# Altium PCB AltiumSTM32_PCB.PcbDoc
Units mm, origin at the board's own origin, x right, y up, seen from the top; angles counter-clockwise.
Board outline 34 x 34 mm, 4 copper layers (L1 (Signal), L2 (GND), L2 (GND) (Mid2), L4 (Signal)), stack 1.586 mm thick; 35 components, 27 nets, 172 pads, 106 vias.
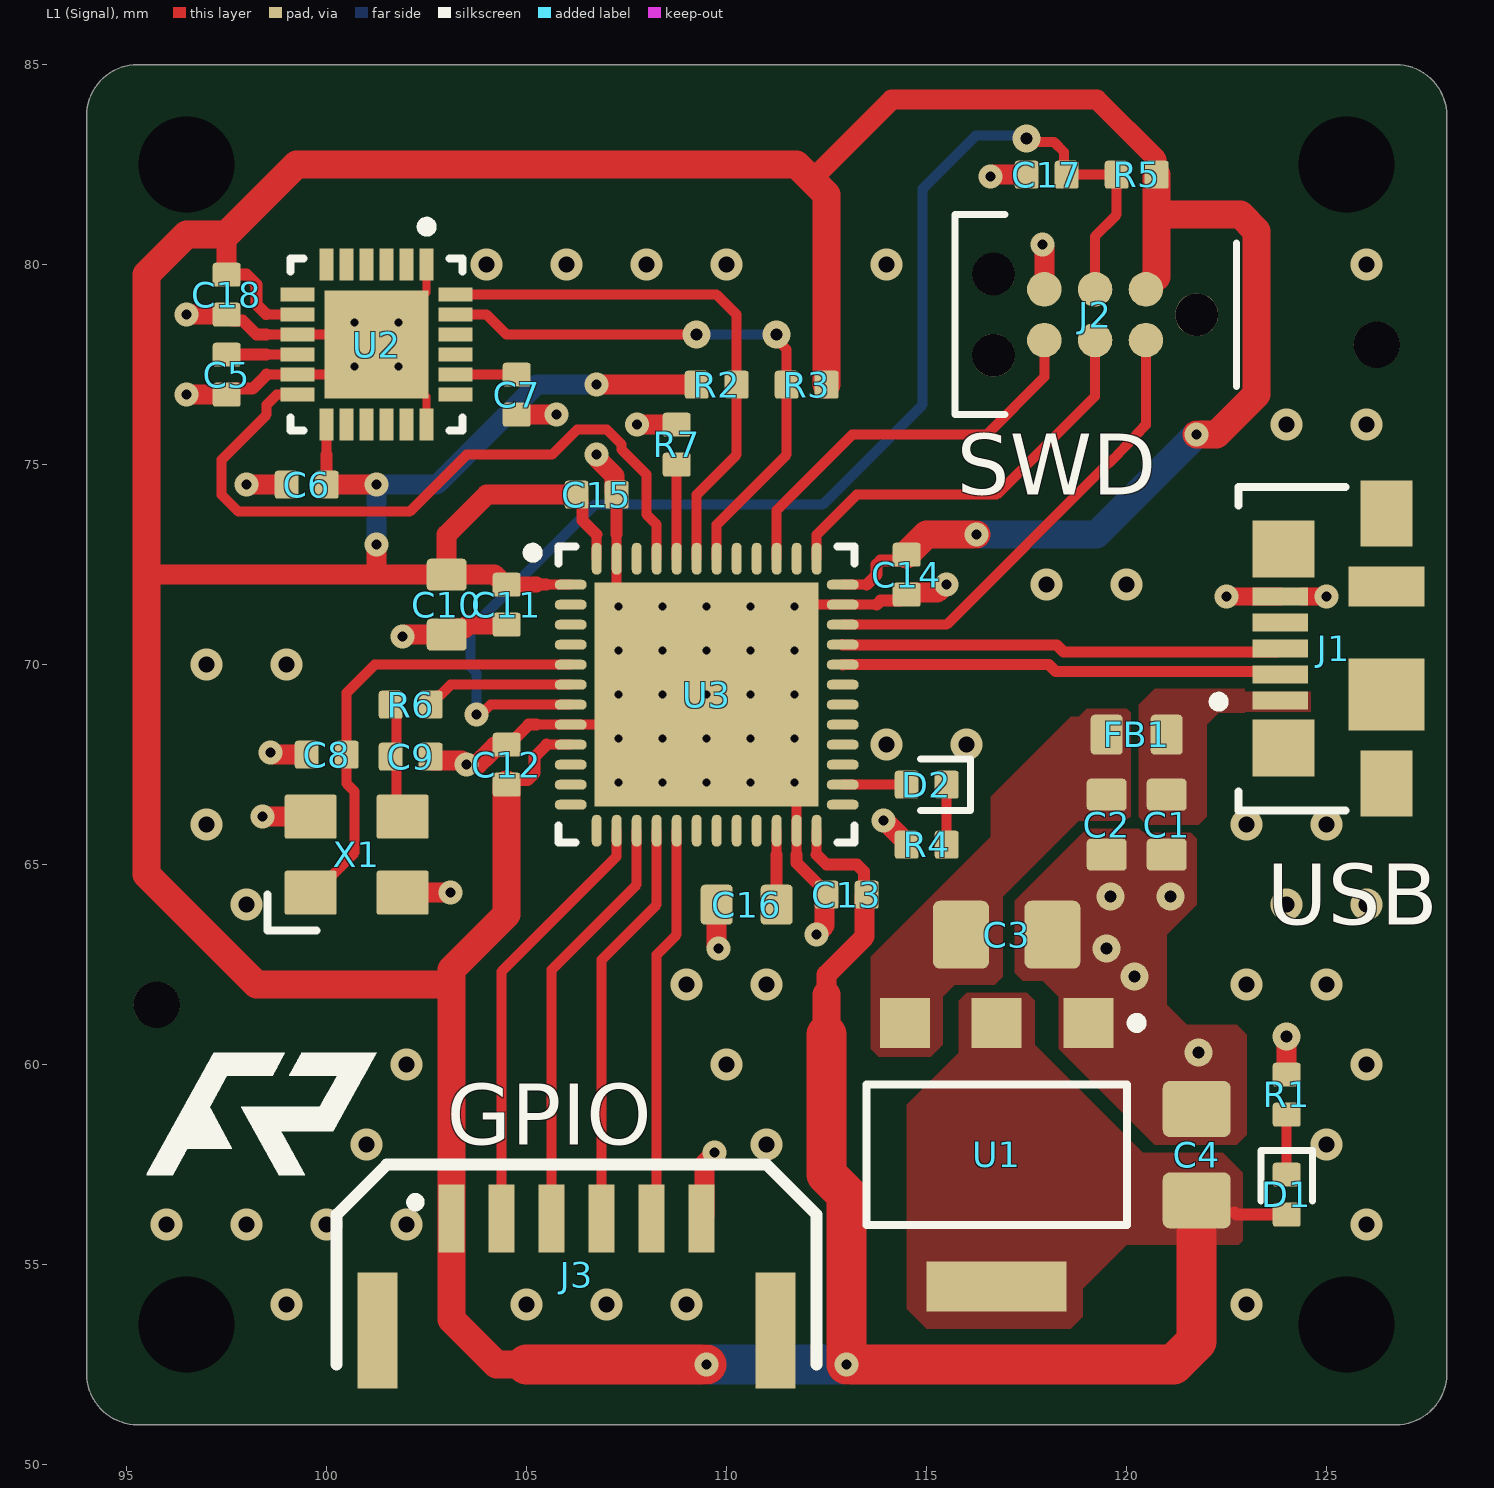
[diagram p0: L1 (Signal) view]
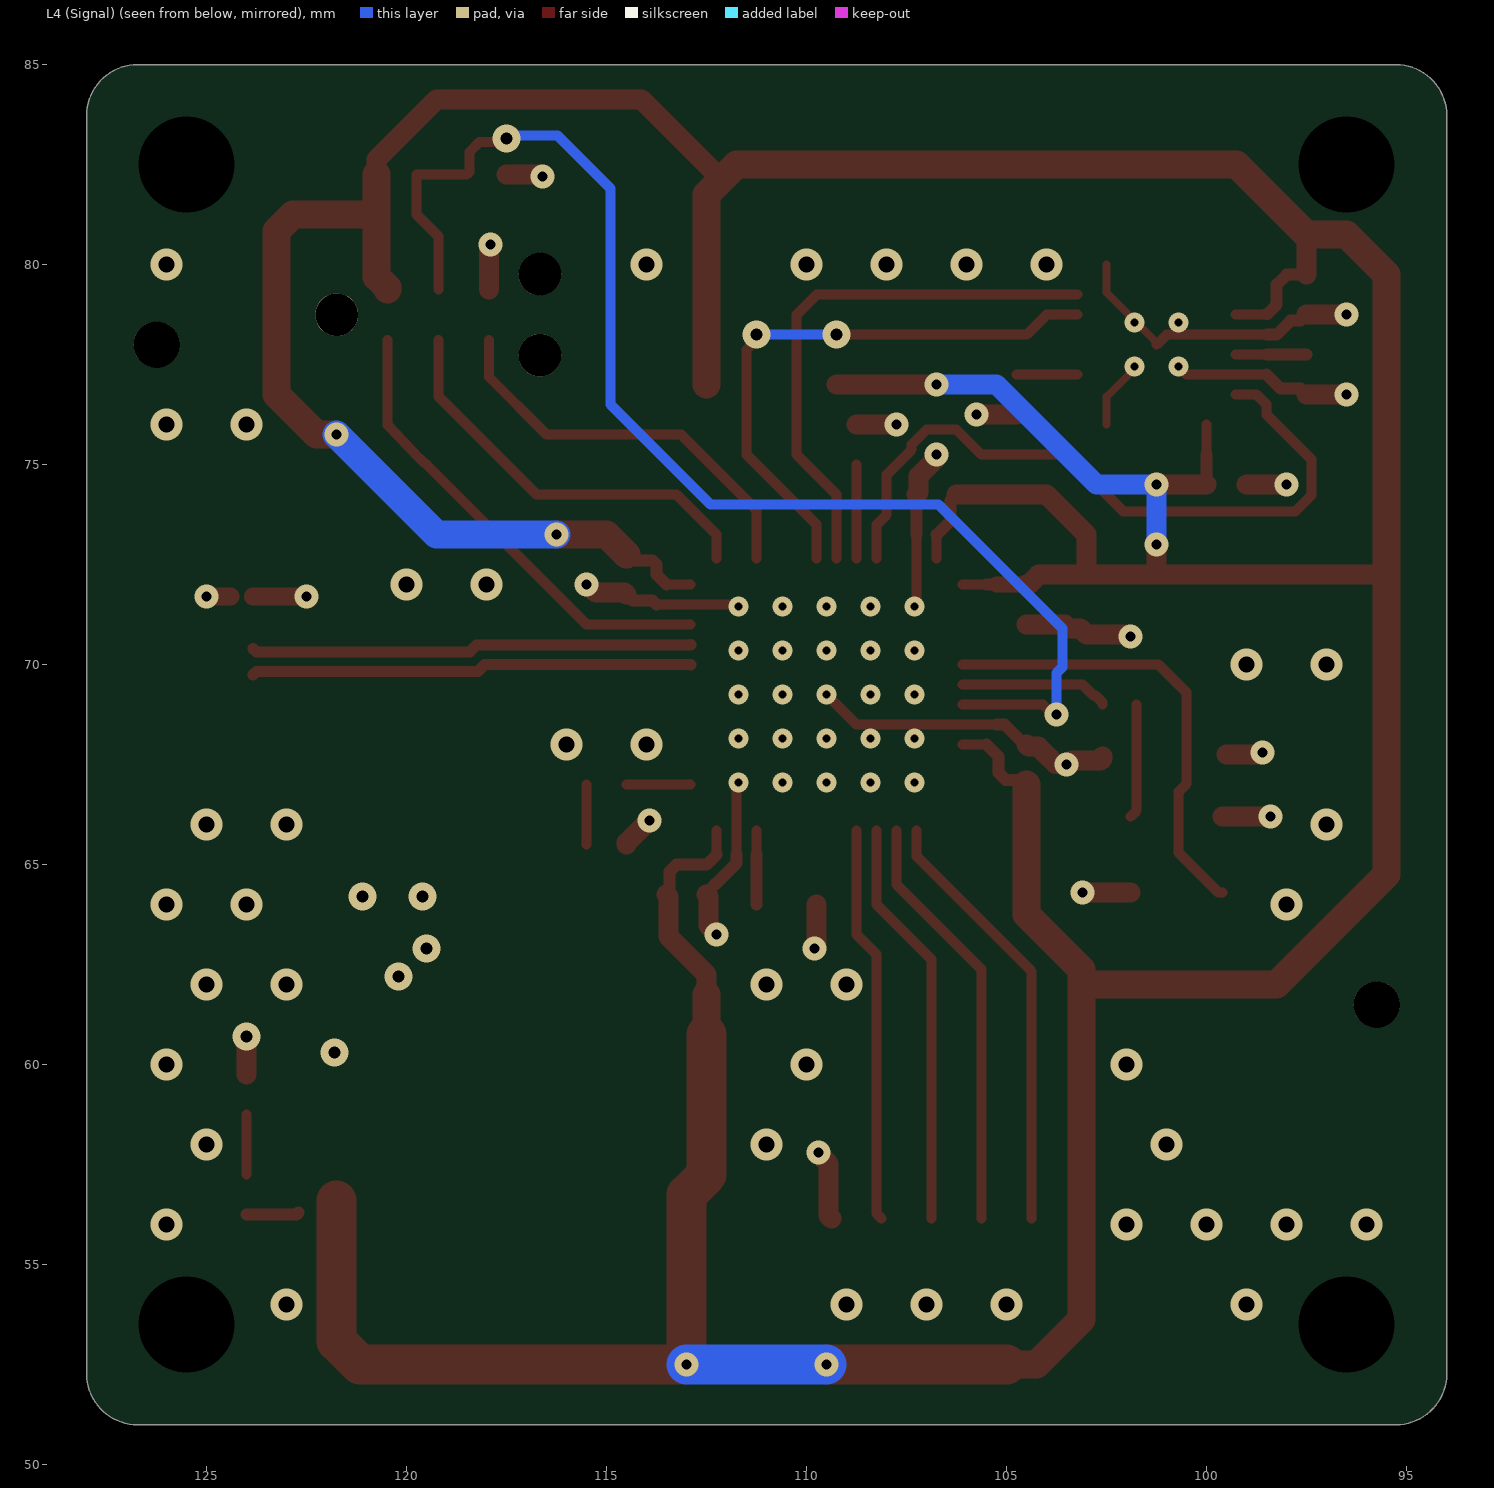
[diagram p1: L4 (Signal) view, seen from below]
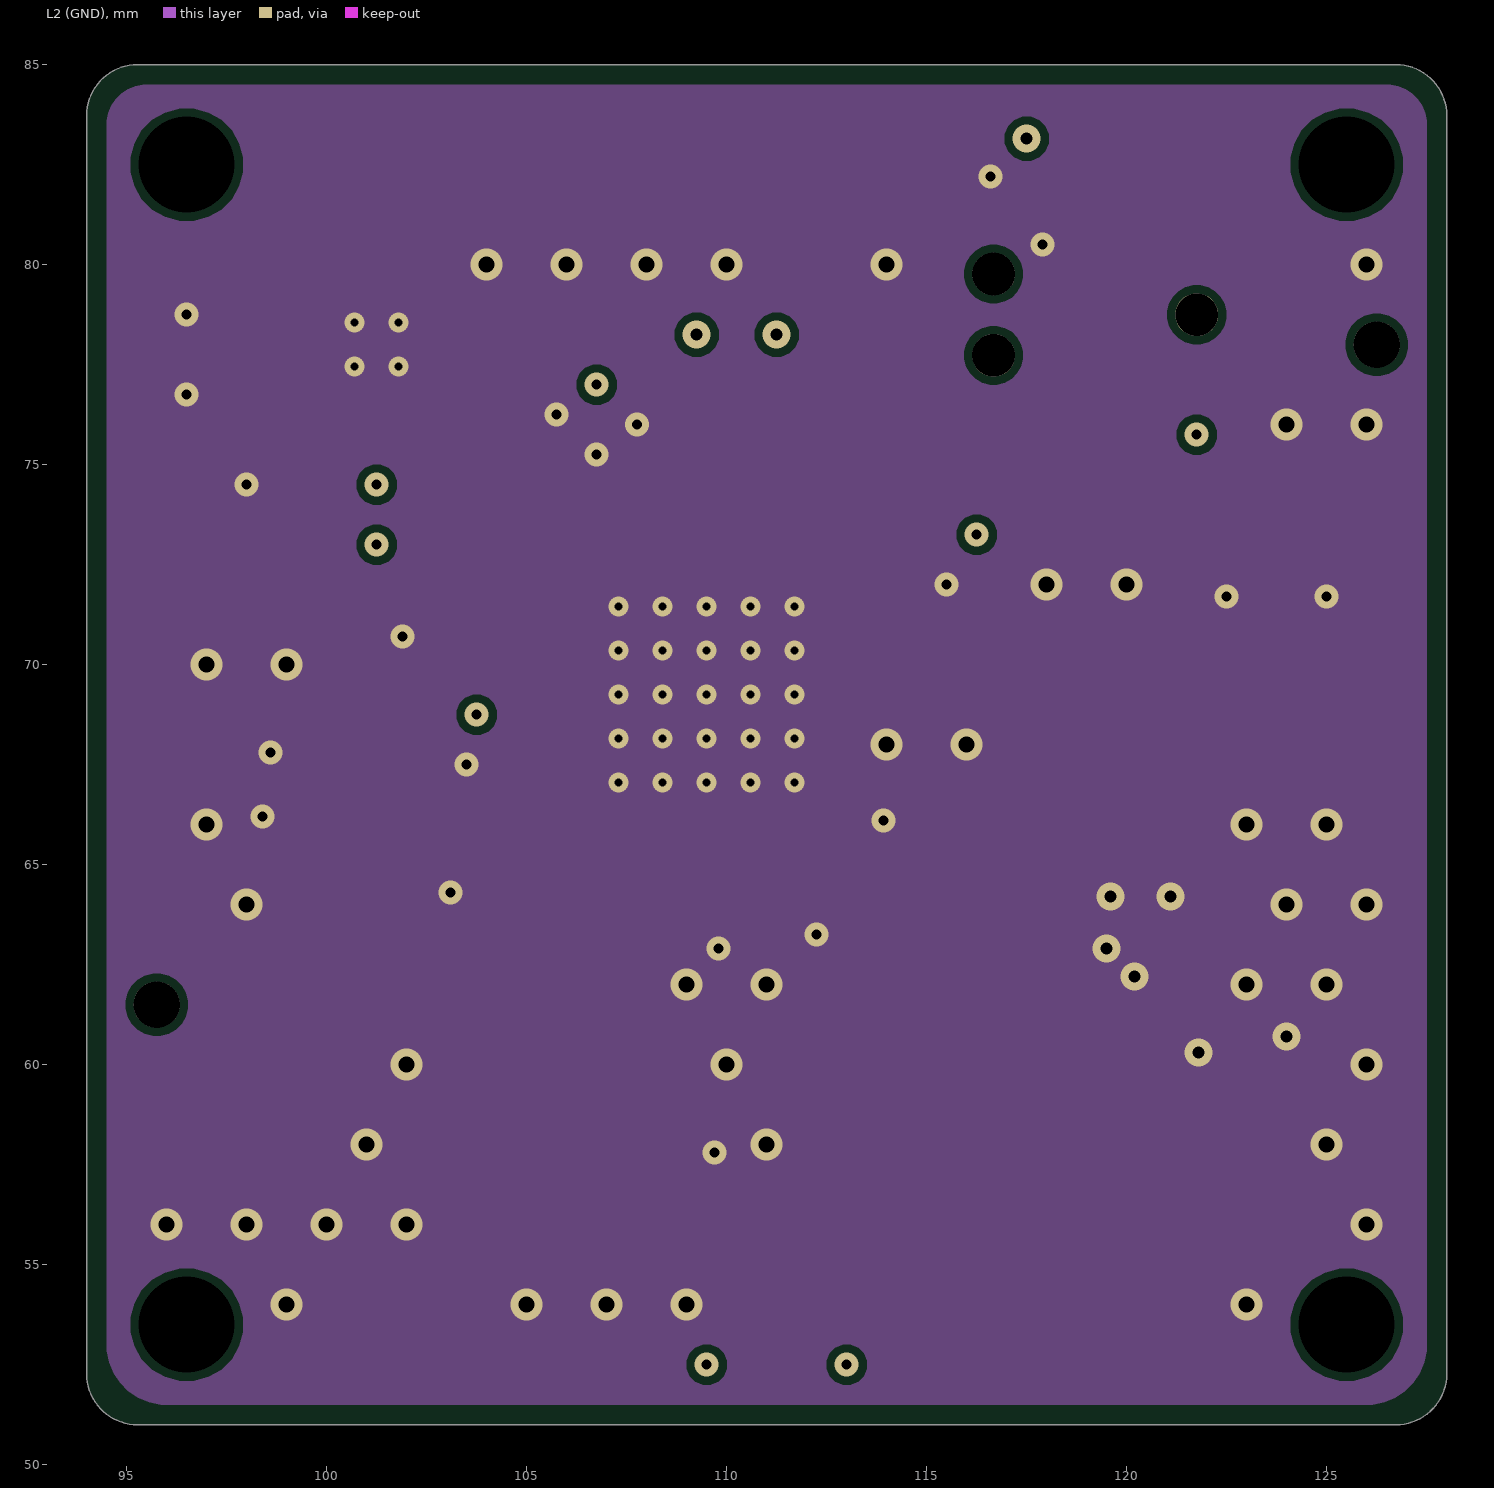
[diagram p2: L2 (GND)]
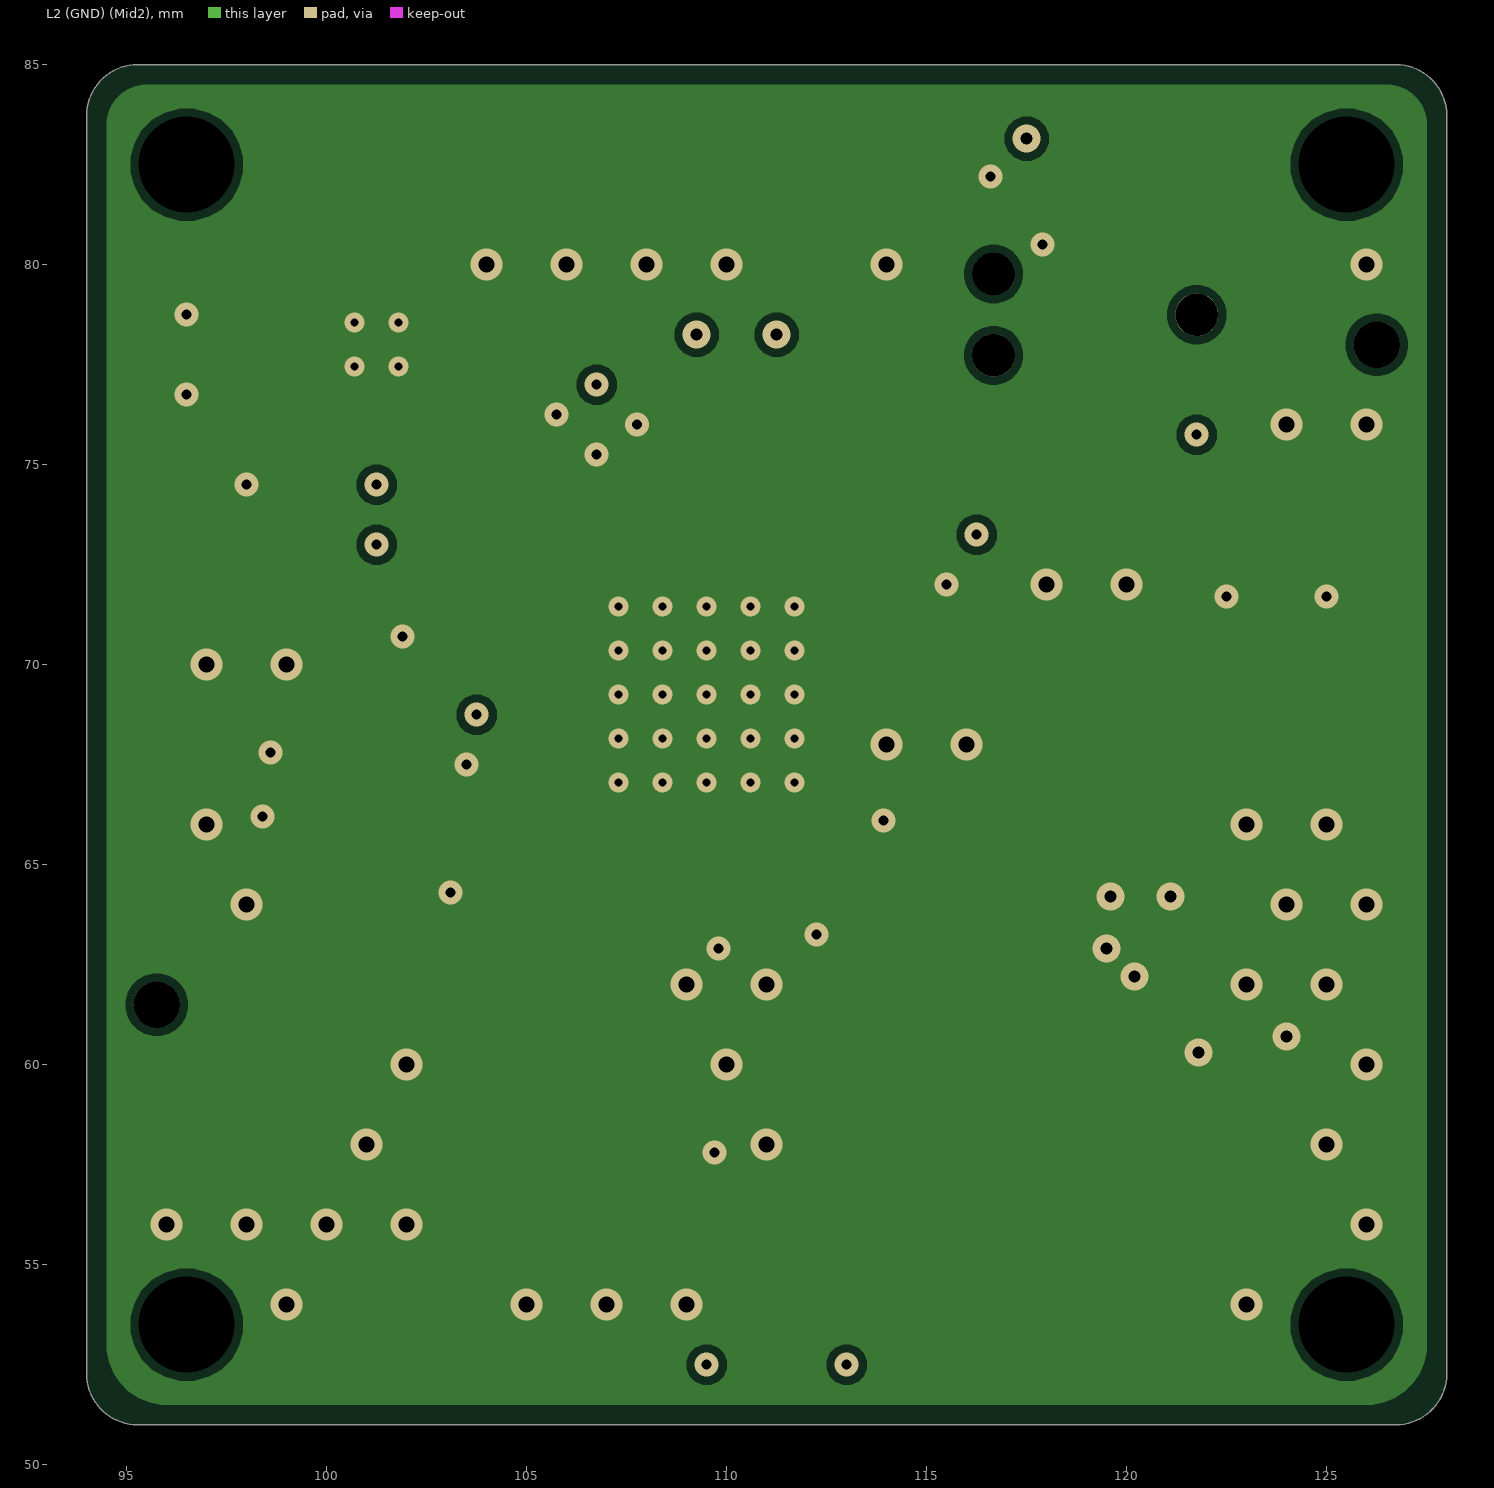
[diagram p3: L2 (GND) (Mid2)]
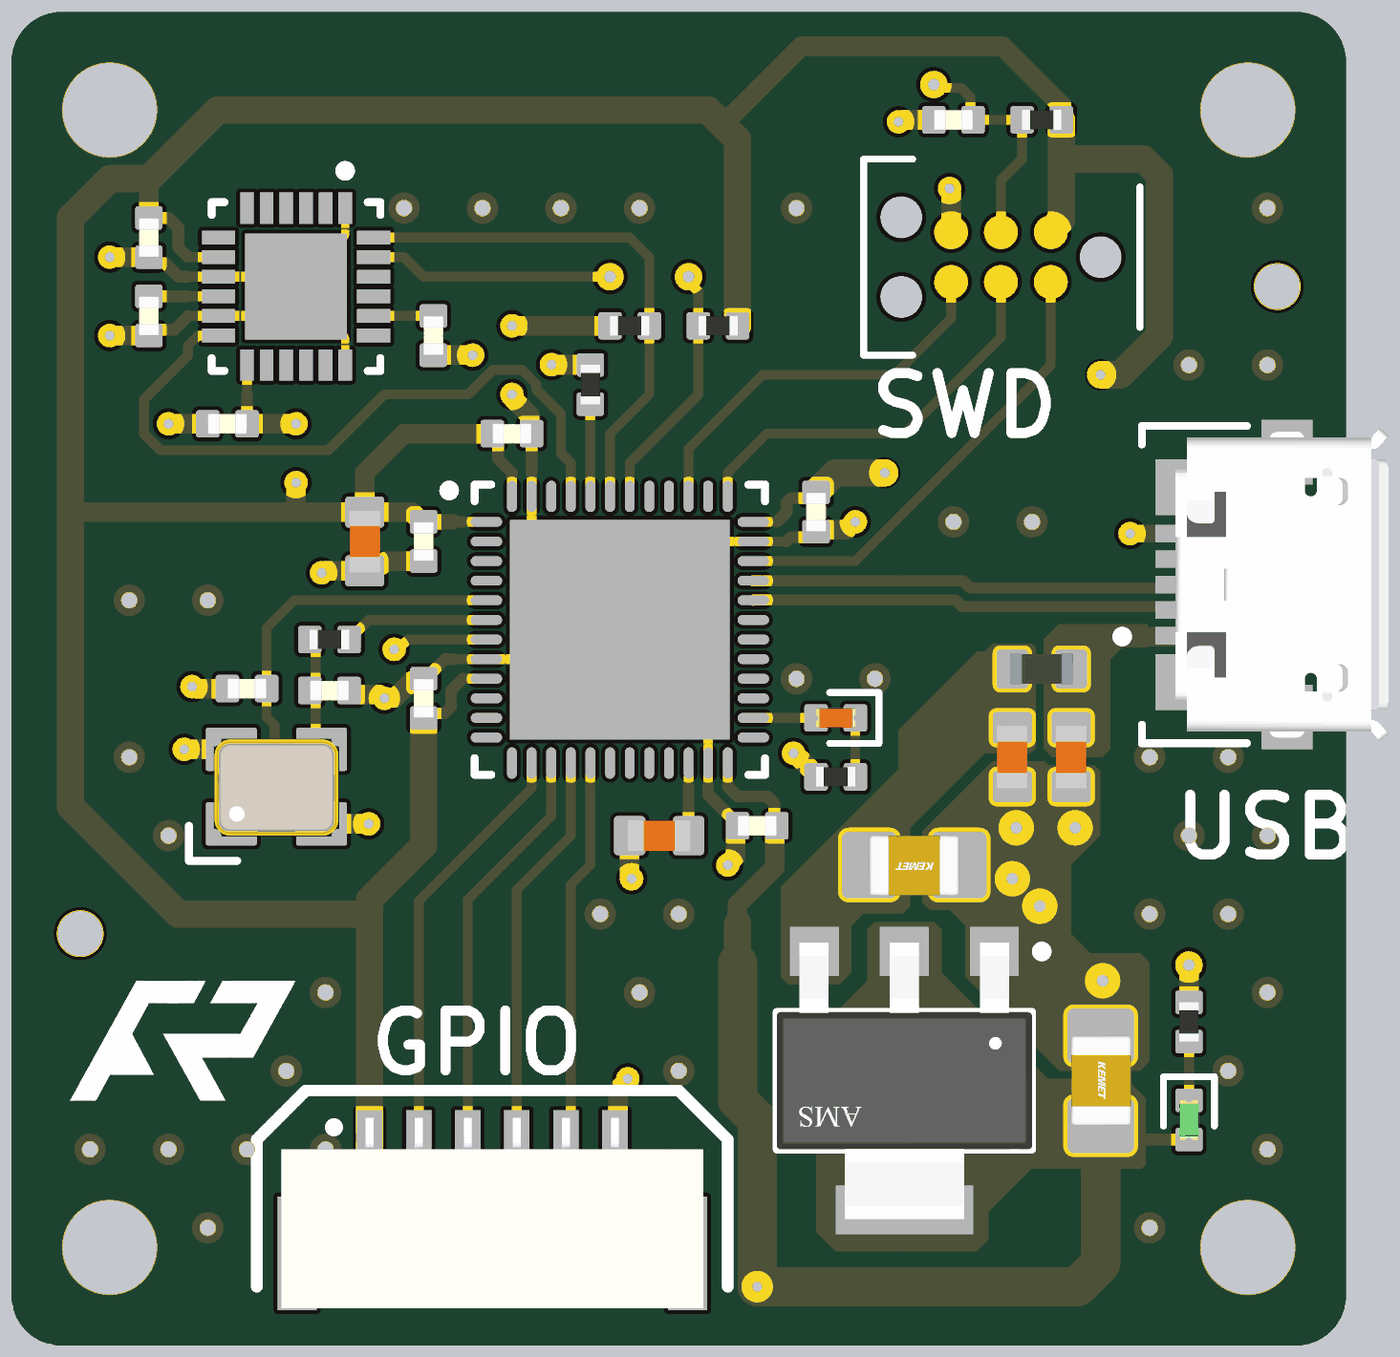
[diagram p4: 3D render of the assembled board from above, using the file's embedded part models]

## Layer stack, top to bottom
Top Solder: solder mask 0.0254, SM-001, Dk 4
L1 (Signal): signal copper 0.035
Dielectric 1: prepreg 0.2104, PP-017, Dk 4.4
L2 (GND): signal copper 0.0152
Dielectric 3: core 1.065, Core-039, Dk 4.6
L2 (GND) (Mid2): signal copper 0.0152
Dielectric 5: prepreg 0.2104, PP-017, Dk 4.4
L4 (Signal): signal copper 0.035
Bottom Solder: solder mask 0.0254, SM-001, Dk 4

## Board outline
94,52.27 94,83.73 cw(c95.27,83.73) 95.27,85 126.73,85 cw(c126.73,83.73) 128,83.73 128,52.27 cw(c126.73,52.27) 126.73,51 95.27,51 cw(c95.27,52.27)

## Design rules (kind name [scope] priority, off if disabled: settings)
Clearance [All] p1: gap=0.2 ignorepadtopadclearanceinfootprint=TRUE
DiffPairsRouting [All] p1: maxlimit=0.254 minlimit=0.203 mostfreqgap=0.254 toplayer_maxgap=0.203 toplayer_prefgap=0.203 toplayer_minwidth=0.281 toplayer_maxwidth=0.281 toplayer_prefwidth=0.281 bottomlayer_maxgap=0.203 bottomlayer_prefgap=0.203 bottomlayer_minwidth=0.281 bottomlayer_maxwidth=0.281 bottomlayer_prefwidth=0.281 impedanceprofiledriven=TRUE impedanceprofileid={25BF9AD4-3A9B-43ED-B17E-88D2018427C5} impedanceprofilevalue=90.000000 maxuncoupledlength=12.7
PolygonConnect [All] p1: connectstyle=Direct reliefconductorwidth=0.254 reliefentries=4 polygonreliefangle="90 Angle" airgapwidth=0.254
RoutingVias [All] p1: holewidth=0.3 width=0.7 viastyle="Through Hole" minholewidth=0.25 minwidth=0.55 maxholewidth=0.4 maxwidth=0.9
SolderMaskExpansion [All] p1: expansion=0.102 istentingtop=FALSE
SupplyNets "Schematic Supply Nets_3" [InNet('GND')] p1: voltage=0.000
SupplyNets "Schematic Supply Nets_2" [InNet('+5V')] p2: voltage=0.000
SupplyNets "Schematic Supply Nets_1" [InNet('VBUS')] p3: voltage=0.000
SupplyNets "Schematic Supply Nets" [InNet('+3V3')] p4: voltage=0.000
UnRoutedNet [All] p1: checkbadconnections=TRUE
Width [All] p1: maxlimit=1 minlimit=0.2 preferedwidth=0.3 midlayer1_minwidth=0.254 midlayer1_maxwidth=0.254 midlayer1_prefwidth=0.254 midlayer2_minwidth=0.254 midlayer2_maxwidth=0.254 midlayer2_prefwidth=0.254 minimp=50.000000 maximp=50.000000 favimp=50.000000
28 further rules are at their usual default settings.

## Classes and differential pairs
net class DIFF_USB: USB_D_N USB_D_P
differential pair USB_D: +USB_D_P -USB_D_N

## Components (designator, comment, footprint, x,y, rotation, side; value= is the part's Value field where it differs from the comment)
C1 "2u2" CAP_0603 121,66 r90 top
C2 "2u2" CAP_0603 119.5,66 r90 top
C3 "22u" CAP_0805 117,63.25 r180 top
C4 "22u" CAP_0805 121.75,57.75 r270 top
C5 "100n" CAP_0402 97.5,77.25 r270 top
C6 "10n" CAP_0402 99.5,74.5 r180 top
C7 "2n2" CAP_0402 104.75,76.75 r270 top
C8 "10p" CAP_0402 100,67.75 r0 top
C9 "10p" CAP_0402 102.1,67.7 r180 top
C10 "2u2" CAP_0603 103,71.5 r90 top
C11 "100n" CAP_0402 104.5,71.5 r90 top
C12 "100n" CAP_0402 104.5,67.5 r270 top
C13 "100n" CAP_0402 113,64.25 r0 top
C14 "100n" CAP_0402 114.5,72.25 r90 top
C15 "100n" CAP_0402 106.75,74.25 r180 top
C16 "2u2" CAP_0603 110.5,64 r0 top
C17 "100n" CAP_0402 118,82.25 r0 top
C18 "100n" CAP_0402 97.5,79.25 r270 top
D1 "GREEN" LED_0402_GREEN 124,56.75 r90 top
D2 "RED" LED_0402_RED 115,67 r0 top
FB1 "120R" FB_0603 120.25,68.25 r180 top
J1 "473460001" FP-473460001-MFG 126.15,70.4 r90 top
J2 "TC2030" TC2030-FP 119.21,78.75 r180 top
J3 "SM06B-GHS-TB" SM06B-GHS-TB 106.25,54.75 r0 top
R1 "1k" RES_0402 124,59.25 r270 top
R2 "2k2" RES_0402 109.75,77 r180 top
R3 "2k2" RES_0402 112,77 r0 top
R4 "1k" RES_0402 115,65.5 r0 top
R5 "10k" RES_0402 120.25,82.25 r0 top
R6 "0R" RES_0402 102.1,69 r0 top
R7 "10k" RES_0402 108.75,75.5 r270 top
U1 "AMS1117-3.3" FP-AMS1117-IPC_C 116.75,57.75 r270 top
U2 "MPU-6050" IS-QFN-24_V 101.25,78 r270 top
U3 "STM32F411CEU6" STM-UFQFPN48_L 109.5,69.25 r0 top
X1 "24MHz" XTAL_3225 100.75,65.25 r0 top

## Footprints (in the part's own frame and the unit in brackets; to place one, negate y for a bottom-side part, rotate by r counter-clockwise, add the part's x,y. Pads: shape width x height; smd on the part's side, far side on the other; paste and mask are expansions set on the pad)
CAP_0402 [mm]
  rrect25% 0.6x0.7 smd: 1(-0.5,0) 2(0.5,0)
  body extent -0.5,-0.26 0.5,0.26, height 0.37
CAP_0603 [mm]
  rrect25% 0.8x1 smd: 1(-0.75,0) 2(0.75,0)
  body extent -0.8,-0.4 0.8,0.4, height 0.51
CAP_0805 [mm]
  rrect25% 1.4x1.7 smd: 1(-1.143,0) 2(1.143,0)
  body extent -1.15,-0.76 1.15,0.79, height 1.01
FB_0603 [mm]
  rrect25% 0.8x1 smd: 1(-0.75,0) 2(0.75,0)
  body extent -0.8,-0.4 0.8,0.4, height 0.81
FP-473460001-MFG [mm]
  rect 0.45x1.38 smd paste+0 mask+0: 1(-1.3,2.31) 2(-0.65,2.31) 3(0,2.31) 4(0.65,2.31) 5(1.3,2.31)
  rect 1.425x1.55 smd paste+0 mask+0: 6(-2.488,2.225) 7(2.488,2.225)
  rect 1.65x1.3 smd paste+0 mask+0: 8(-3.375,-0.35) 11(3.375,-0.35)
  rect 1.8x1.9 smd paste+0 mask+0: 9(-1.15,-0.35)
  rect 1x1.9 smd paste+0 mask+0: 10(1.55,-0.35)
  silkscreen extent -4.05,0.67 4.05,3.97, body extent -4.3,-2.48 4.3,3.45, height 0.25
FP-AMS1117-IPC_C [mm]
  rect 1.25x1.25 smd paste+0 mask+0: 1(-3.295,2.29) 2(-3.295,0) 3(-3.295,-2.29)
  rect 1.25x3.5 smd paste+0 mask+0: 4(3.295,0)
  silkscreen extent -3.42,-3.25 1.75,3.63, body extent -3.9,-3.35 3.9,3.35, height 0.25
IS-QFN-24_V [mm] "QFN, 24-Leads, Body 4x4mm, Pitch 0.5mm, Thermal Pad 2.7x2.6mm"
  rect 0.8x0.35 smd: 1(-2,1.25) 2(-2,0.75) 3(-2,0.25) 4(-2,-0.25) 5(-2,-0.75) 6(-2,-1.25) 13(2,-1.25) 14(2,-0.75) 15(2,-0.25) 16(2,0.25) 17(2,0.75) 18(2,1.25)
  rect 0.35x0.85 smd mask+0.102: 7(-1.25,-1.975) 8(-0.75,-1.975) 9(-0.25,-1.975) 10(0.25,-1.975) 11(0.75,-1.975) 12(1.25,-1.975) 19(1.25,1.975) 20(0.75,1.975) 21(0.25,1.975) 22(-0.25,1.975) 23(-0.75,1.975) 24(-1.25,1.975)
  rect 2.7x2.6 smd: 25(0,0)
  silkscreen extent -3.07,-2.15 2.15,2.15, body extent -2,-2 2,2, height 0.95
LED_0402_GREEN [mm]
  rrect25% 0.6x0.7 smd: A(-0.5,0) K(0.5,0)
  silkscreen extent -0.15,-0.65 1.1,0.65, body extent -0.51,-0.25 0.51,0.25, height 0.45
LED_0402_RED [mm]
  rrect25% 0.6x0.7 smd: A(-0.5,0) K(0.5,0)
  silkscreen extent -0.15,-0.65 1.1,0.65, body extent -0.51,-0.25 0.51,0.25, height 0.45
RES_0402 [mm]
  rrect25% 0.6x0.7 smd: 1(-0.5,0) 2(0.5,0)
  body extent -0.5,-0.25 0.5,0.25, height 0.3
SM06B-GHS-TB [mm]
  rect 0.65x1.7 smd: 1(-3.125,1.4) 2(-1.875,1.4) 3(-0.625,1.4) 4(0.625,1.4) 5(1.875,1.4) 6(3.125,1.4)
  rect 1x2.9 smd: ""(-4.975,-1.4) ""(4.975,-1.4)
  silkscreen extent -6,-2.25 6,2.75, body extent -5.38,-2.8 5.38,2.05, height 4.26
STM-UFQFPN48_L [mm] "QFN, 48-Leads, Body 7.1x7.1mm, Pitch 0.5mm, Thermal Pad 5.6x5.6mm, IPC High Density"
  oval 0.8x0.25 smd: 1(-3.4,2.75) 2(-3.4,2.25) 3(-3.4,1.75) 4(-3.4,1.25) 5(-3.4,0.75) 6(-3.4,0.25) 7(-3.4,-0.25) 8(-3.4,-0.75) 9(-3.4,-1.25) 10(-3.4,-1.75) 11(-3.4,-2.25) 12(-3.4,-2.75) 25(3.4,-2.75) 26(3.4,-2.25) 27(3.4,-1.75) 28(3.4,-1.25) 29(3.4,-0.75) 30(3.4,-0.25) 31(3.4,0.25) 32(3.4,0.75) 33(3.4,1.25) 34(3.4,1.75) 35(3.4,2.25) 36(3.4,2.75)
  oval 0.25x0.8 smd: 13(-2.75,-3.4) 14(-2.25,-3.4) 15(-1.75,-3.4) 16(-1.25,-3.4) 17(-0.75,-3.4) 18(-0.25,-3.4) 19(0.25,-3.4) 20(0.75,-3.4) 21(1.25,-3.4) 22(1.75,-3.4) 23(2.25,-3.4) 24(2.75,-3.4) 37(2.75,3.4) 38(2.25,3.4) 39(1.75,3.4) 40(1.25,3.4) 41(0.75,3.4) 42(0.25,3.4) 43(-0.25,3.4) 44(-0.75,3.4) 45(-1.25,3.4) 46(-1.75,3.4) 47(-2.25,3.4) 48(-2.75,3.4)
  rect 5.6x5.6 smd: 49(0,0)
  silkscreen extent -4.47,-3.7 3.7,3.7, body extent -3.55,-3.55 3.55,3.55, height 0.6
TC2030-FP [mil]
  round 33.98 smd paste-17.01: 1(-50,-25) 2(-50,25) 3(0,-25) 4(0,25) 5(50,-25) 6(50,25)
  round 42.01 hole 42.01 unplated: MH(-100,0) MH(100,-40) MH(100,40)
  silkscreen extent -139,-98 138,98
XTAL_3225 [mm]
  rrect10% 1.3x1.1 smd: 1(-1.15,-0.95) 2(1.15,-0.95) 3(1.15,0.95) 4(-1.15,0.95)
  silkscreen extent -2.23,-1.89 -1,-1, body extent -1.6,-1.28 1.6,1.22, height 0.61

## Part data
C1 C2 C10 C16: library part CAP_0603, "Capacitor SMD 0603", Rating=16V
C3 C4: library part CAP_0805, "Capacitor SMD 0805", Rating=16V
C5 C6 C7 C8 C9 C11 C12 C13 C14 C15 C17 C18: library part CAP_0402, "Capacitor SMD 0402", Rating=16V
D1: library part LED_0402_GREEN, "LED 0402 GREEN SMD"
D2: library part LED_0402_RED, "LED 0402 RED SMD"
FB1: library part FB_0603, "Ferrite Bead SMD 0603"
J1: library part CMP-2000-05246-2, "CONN RCPT USB2.0 MICRO B SMD R/A", Current Rating=1.8A, Manufacturer=Molex, Package=0, Temperature="-30°C to +85°C", Temperature Range High=+85°C, Temperature Range Low=-30°C, Voltage Rating=30V, Automotive=No, Category=Conn, ComponentLink2Description=Datasheet, ComponentLink2URL=https://www.molex.com/webdocs/datasheets/pdf/en-us/0473460001_IO_CONNECTORS.pdf, Conn Orientation="Right Angle", Contact Material=Gold,Nickel, Device Class L1=Connectors, Device Class L2="USB Connectors", Device Class L3=unset, Digikey Description="CONN RCPT USB2.0 MICRO B SMD R/A", Footprint Url=https://www.molex.com/pdm_docs/sd/473460001_sd.pdf, Height=2.945mm, Is Female=yes, Lead Free=Yes, Manufacturer Part Number=473460001, Number Of Contacts=5, Octopart=https://octopart.com/47346-0001-molex-7164928, Pitch=0.65mm, RoHS=TRUE, Shielding=true, Usb Standard="USB 2.0"
J2: "Tag-Connect No-Solder SWD Debug Connector DO NOT PLACE", Manufacturer=Tag-Connect, Manufacturer Part Number=TC2030
J3: "Header Connector 6 Position 1.25MM Pitch SMD Horizontal JST GH", Manufacturer=JST, Manufacturer Part Number=SM06B-GHS-TB
R1 R2 R3 R4 R5 R6 R7: library part RES_0402, "Resistor SMD 0402"
U1: library part CMP-209535-000001-1, "LDO Voltage Regulators 1A, 3.3V", Dropout Voltage=1.1V, Manufacturer="Advanced Monolithic Systems", Max Junction Temp=+125°C, Max Power Dissipation=1.2W, Max Supply Voltage=15V, Nominal Supply Current=5mA, Output Current=1A, Output Voltage=3.3V, Package=AMS1117, Temperature="-40°C to +125°C", Temperature Range Low=-40°C, Automotive=No, Category=IC, ComponentLink2Description=Datasheet, ComponentLink2URL=http://www.advanced-monolithic.com/pdf/ds1117.pdf, Device Class L1="Integrated Circuits (ICs)", Device Class L2="Power Management ICs", Device Class L3="Voltage Regulators - Linear", Height=1.8mm, Ipc Land Pattern Name=SOT229P700X180-4, Lead Free=Yes, Manufacturer Part Number=AMS1117-3.3, Number Of Outputs=1, Octopart=https://octopart.com/ams1117-3.3-advanced+monolithic+systems-25899300, Output Type=Fixed, RoHS=TRUE, Standoff Height=0.64mm, Temperature Range High=+125°C
U2: library part CMP-1753-00002-2, "3-Axis Gyroscope, Accelerometer and a Digital Motion Processor(TM) (DMP), 2.375 to 3.46 V, -40 to 85 degC, 24-Pin QFN, RoHS, Tape and Reel", Manufacturer=InvenSense, Standard Package=5,000, Category=Sensors,Transducers, Datasheet URL=http://datasheet.octopart.com/MPU-6050-InvenSense-datasheet-14421344.pdf, Datasheet Version="Rev. 3.3, 05/2012", Dynamic Catalog=MPU-6000™Series, Family=Multifunction, Featured Product=MPU-60506-Axis,IntegratedI²CSolution, Manufacturer URL=http://www.invensense.com/, Online Catalog=MPU-6000™Series, Other Names="1428-1007-2 / MPU6050", Output Type=Digital, Sensor Type=MotionTracking, Unit PriceUSD=Digital
U3: library part CMP-0243-00165-1, "ARM Cortex-M4 32-bit MCU+FPU, 512 KB Flash, 128 KB RAM, 36 I/Os, 48-Pin UFQFPN, -40 to 85 degC, Tray", I/Os (High Current)=36, Operating Frequency(F) (Processor speed) (MHz)=100, Package Description=UFQFPN48, Package Reference="48-Pin Ultra Thin Fine Pitch Quad Flat No-Lead, 7 x 7 x 0.6 mm Body, 0.5 mm Pitch, Exposed Pad", Supply Voltage(Vcc) min (V)=1.7, ComponentLink1Description="Manufacturer URL", ComponentLink1URL=http://www.st.com/, ComponentLink2Description=Datasheet, ComponentLink2URL=http://www.st.com/st-web-ui/static/active/en/resource/technical/document/datasheet/DM00115249.pdf, Core="ARM Cortex-M4", DatasheetVersion="Rev. 6", FLASH Size (Prog) (kB)=512, Internal RAM Size (kB)=128, Mounting Technology="Surface Mount", Packing=Tray
X1: library part TSX-3225_24.0000MF15X-AC, "Crystal SMD 24MHz 10PPM 7pF 3225", Manufacturer=Epson, Manufacturer Part Number="TSX-3225 24.0000MF15X-AC"

## Free pads (board coordinates)
  round 2 hole 2.4: MH(96.5,53.5) MH(96.5,82.5) MH(125.5,53.5) MH(125.5,82.5)
  round 1.152 hole 1.152: TH(95.75,61.5) TH(126.25,78)

## Via types
v1: diameter 0.8, hole 0.4, L1 (Signal) to L4 (Signal), tented both sides, 40 vias
v2: diameter 0.5, hole 0.2, L1 (Signal) to L4 (Signal), 29 vias
v3: diameter 0.6, hole 0.25, L1 (Signal) to L4 (Signal), 28 vias
v4: diameter 0.7, hole 0.3, L1 (Signal) to L4 (Signal), 9 vias

## Nets (pads, with @x,y where several pads share a name; then routed paths per layer and width w, separated by ;. In a path a pad name is that pad's centre, name@x,y a point inside that pad or via, vN(x,y) a via of type N, cw(c..) or ccw(c..) an arc to the next point about the centre after c; other vN are vias at no path point)
+3V3: C4.2 C6.1 C10.2 C11.2 C12.2 C13.2 C14.2 C15.2 C18.1 D1.A J2.1 J3.1 R2.2 R3.2 R5.2 U1.2 U1.4 U2.8 U2.13 U3.1 U3.9 U3.24 U3.36 U3.48 | length 169.7
  L1 (Signal) w0.25: 98.5,78.764 98.514,78.75 U2.8 ; 100,75.25 U2.13 ; 105.5,68 U3.9 ; 105.5,72 U3.1 ; U3.48 106.75,73.25 ; 112.25,65.25 U3.24 ; U3.36 113.5,72
  L1 (Signal) w0.3: C18.1 98,79.75 98.25,79.5 98.25,79 98.486,78.764 98.5,78.764 ; C6.1 100,75.25 ; C12.2 104.618,67.118 105.024,67.118 105.2,67.294 105.2,67.7 105.5,68 ; 105.25,72 105.5,72 ; C15.2 106.4,74.1 106.4,73.6 106.75,73.25 ; 112.25,65.25 112.5,65 113.256,65 113.432,64.824 113.432,64.318 C13.2 ; 113.5,72 113.75,72.25 113.75,72.5 113.85,72.6 114.35,72.6 C14.2 ; 122.7,56.3 122.75,56.25 D1.A
  L1 (Signal) w0.4: C11.2 105.25,72
  L1 (Signal) w0.5: 95.5,72.25 101.25,72.25 ; C18.1 97.5,80.75 ; C6.1 v3(101.25,74.5) ; v3(101.25,73) 101.25,72.25 ; C11.2 104.45,72 104.2,72.25 C10.2 ; C15.2 104,74.25 103,73.25 C10.2 ; v3(106.75,77) R2.2 ; 112.125,82.125 114.125,84.125 119.259,84.125 120.75,82.634 R5.2 ; 112.5,61.75 112.5,62.25 113.45,63.2 113.45,64.2 C13.2 ; 101.25,72.25 C10.2
  L1 (Signal) w0.7: 103.125,61.875 103,62 98.25,62 95.5,64.75 95.5,72.25 95.5,79.75 96.5,80.75 97.5,80.75 99.25,82.5 111.75,82.5 112.125,82.125 112.5,81.75 R3.2 ; C12.2 104.5,63.75 103.125,62.375 103.125,62 J3.1 103.125,53.625 104.25,52.5 105,52.5 ; 112.5,60.75 112.5,61.75 ; C14.2 115,73.25 v3(116.25,73.25) ; J2.1 120.48,79.429 120.75,79.699 120.75,81.25 ; R5.2 120.75,81.25 ; v3(121.75,75.75) 122.25,75.75 123.25,76.75 123.25,80.84 122.84,81.25 120.75,81.25
  L1 (Signal) w1: 105,52.5 v3(109.5,52.5) ; 112.5,60.75 112.5,57.25 113,56.75 v3(113,52.5) 121.164,52.5 121.75,53.086 C4.2
  L4 (Signal) w0.5: v3(101.25,73) v3(101.25,74.5) 102.75,74.5 105.25,77 v3(106.75,77)
  L4 (Signal) w0.7: v3(116.25,73.25) 119.25,73.25 v3(121.75,75.75)
  L4 (Signal) w1: v3(109.5,52.5) v3(113,52.5)
+5V: C2.2 C3.2 FB1.2 U1.3
GND: C1.1 C2.1 C3.1 C4.1 C5.2 C6.2 C7.2 C8.1 C9.1 C10.1 C11.1 C12.1 C13.1 C14.1 C15.1 C16.1 C17.1 C18.2 J1.5 J2.5 J3.6 R1.1 R4.1 R7.1 U1.1 U2.1 U2.9 U2.11 U2.18 U2.25 U3.8 U3.23 U3.35 U3.47 U3.49 X1.2 X1.4 | length 51.4
  L1 (Signal) w0.2: U2.25 101.25,78.05 102.5,79.3 U2.1 ; U2.25@101.775,77.425 102.5,76.7 U2.18
  L1 (Signal) w0.25: 98.5,77.25 U2.11 100.5,77.25 v2(100.7,77.45) ; 98.5,78.25 U2.9 101,78.25 U2.25 ; 105.25,68.5 U3.8 108.75,68.5 v2(109.5,69.25) ; U3.49@107.25,71.5 U3.47 107.25,73.25 ; 111.75,65.25 U3.23 U3.49@111.75,67 ; U3.49@111.75,71.5 U3.35 113.75,71.5
  L1 (Signal) w0.3: C5.2 97.65,76.9 98.15,76.9 98.5,77.25 ; C18.2 97.65,78.6 97.9,78.6 98.25,78.25 98.5,78.25 ; C12.1@104.55,68 105.05,68.5 105.25,68.5 ; v3@106.75,75.169 v3(106.75,75.25) ; 107.25,73.25 C15.1 ; 111.75,65.25 111.75,65.043 112.293,64.5 112.3,64.5 112.5,64.3 C13.1 ; 113.75,71.5 113.85,71.6 114.35,71.6 C14.1
  L1 (Signal) w0.45: v3(122.5,71.7) J1.5 ; J1.5@124.4,71.7 v3(125,71.7)
  L1 (Signal) w0.5: v3(96.5,76.75) C5.2 ; v3(96.5,78.75) C18.2 ; v3(98,74.5) C6.2 ; v3(98.4,66.2) X1.4 ; v3(98.6,67.8) 98.627,67.8 98.677,67.75 C8.1 ; X1.2 v3(103.1,64.3) ; v3(101.9,70.7) 101.927,70.7 101.977,70.75 C10.1 103.15,70.9 103.443,70.9 103.543,71 C11.1 ; C9.1 102.6,67.65 102.65,67.6 103.373,67.6 103.473,67.5 v3(103.5,67.5) 103.519,67.519 103.777,67.519 103.908,67.65 103.911,67.65 104.211,67.95 104.45,67.95 C12.1 ; C7.2 v3(105.75,76.25) ; v3@106.75,75.204 106.769,75.204 106.769,75.15 107.2,74.719 107.2,74.3 C15.1 ; v3(107.759,76.009) 107.763,76.004 108.746,76.004 R7.1 ; J3.6 109.45,56.225 109.45,57.523 109.7,57.773 v3(109.7,57.8) ; C16.1 109.75,62.977 109.8,62.927 v3(109.8,62.9) ; v3(112.25,63.25) 112.25,63.277 112.45,63.477 112.45,64.2 C13.1 ; v3(113.925,66.1) 113.95,66.1 114.5,65.55 R4.1 ; C14.1 114.55,71.8 115.273,71.8 115.473,72 v3(115.5,72) ; v3(116.6,82.2) 116.627,82.2 116.677,82.25 C17.1 ; v3(117.9,80.5) 117.9,80.473 117.94,80.433 J2.5 ; v3(122.5,71.7) v3@122.519,71.719 ; R1.1 v4(124,60.7)
  other v1: 99,54 105,54 107,54 109,54 123,54 96,56 98,56 100,56 102,56 126,56 101,58 111,58 125,58 102,60 110,60 126,60 109,62 111,62 123,62 125,62 98,64 124,64 126,64 97,66 123,66 125,66 114,68 116,68 97,70 99,70 118,72 120,72 124,76 126,76 104,80 106,80 108,80 110,80 114,80 126,80
  other v2: 107.3,67.05 108.4,67.05 109.5,67.05 110.6,67.05 111.7,67.05 107.3,68.15 108.4,68.15 109.5,68.15 110.6,68.15 111.7,68.15 107.3,69.25 108.4,69.25 110.6,69.25 111.7,69.25 107.3,70.35 108.4,70.35 109.5,70.35 110.6,70.35 111.7,70.35 107.3,71.45 108.4,71.45 109.5,71.45 110.6,71.45 111.7,71.45 101.8,77.45 100.7,78.55 101.8,78.55
  other v4: 121.8,60.3 120.2,62.2 119.5,62.9 119.6,64.2 121.1,64.2
IMU_CPOUT: C7.1 U2.20 | length 1.5
  L1 (Signal) w0.25: U2.20 C7.1
IMU_INT: U2.12 U3.45 | length 18
  L1 (Signal) w0.25: U2.12 98.75,76.75 98.5,76.5 98.5,76.25 97.375,75.125 97.375,74.241 97.791,73.825 102.075,73.825 103.5,75.25 105.634,75.25 106.259,75.875 107.009,75.875 107.375,75.509 107.375,75.375 108,74.75 108,73.75 108.25,73.5 U3.45
IMU_REGOUT: C5.1 U2.10 | length 1.8
  L1 (Signal) w0.25: 98.5,77.75 U2.10
  L1 (Signal) w0.3: C5.1 98.5,77.75
IMU_SCL: R3.1 U2.23 U3.42 | length 14.7
  L1 (Signal) w0.25: U2.23 104,78.75 104.5,78.25 v4(109.25,78.25) ; U3.42 109.75,73.5 111.5,75.25 R3.1 111.5,77.75 111.5,77.878 111.25,78.128 v4(111.25,78.25)
  L4 (Signal) w0.25: v4(109.25,78.25) v4(111.25,78.25)
IMU_SDA: R2.1 U2.24 U3.43 | length 13.7
  L1 (Signal) w0.25: U2.24 109.75,79.25 110.25,78.75 R2.1 110.25,75.25 109.25,74.25 U3.43
LED_PWR_K: D1.K R1.2 | length 1.5
  L1 (Signal) w0.25: D1.K R1.2
MCU_BOOT0: R7.2 U3.44 | length 2.4
  L1 (Signal) w0.25: U3.44 R7.2
MCU_LED_A: D2.A U3.26 | length 1.6
  L1 (Signal) w0.25: U3.26 D2.A
MCU_LED_K: D2.K R4.2 | length 1.5
  L1 (Signal) w0.25: R4.2 D2.K
MCU_NRST: C17.2 J2.3 R5.1 U3.7 | length 32.9
  L1 (Signal) w0.25: v3(103.75,68.75) 103.845,68.75 104.095,69 U3.7 ; v4(117.5,83.15) 117.586,83.064 118.186,83.064 118.432,82.818 118.432,82.318 C17.2 R5.1 119.75,81.25 119.21,80.71 J2.3
  L4 (Signal) w0.25: v3(103.75,68.75) 103.75,69.797 103.6,69.947 103.6,70.9 106.7,74 112.4,74 114.9,76.5 114.9,81.9 116.236,83.236 117.414,83.236 v4(117.5,83.15)
MCU_OSC_IN: C8.2 U3.5 X1.1 | length 11.5
  L1 (Signal) w0.25: X1.1 99.7,64.3 100.7,65.3 100.7,66.825 100.5,67.025 C8.2 100.5,69.3 101.2,70 U3.5
MCU_OSC_OUT: R6.2 U3.6 | length 3.7
  L1 (Signal) w0.25: R6.2 102.6,69.05 102.775,69.225 102.825,69.225 103.1,69.5 U3.6
MCU_PA4: J3.2 U3.14 | length 10.9
  L1 (Signal) w0.25: J3.2 104.375,62.335 107.25,65.21 U3.14
MCU_PA5: J3.3 U3.15 | length 10.6
  L1 (Signal) w0.25: J3.3 105.625,62.375 107.75,64.5 U3.15
MCU_PA6: J3.4 U3.16 | length 10.3
  L1 (Signal) w0.25: J3.4 106.875,62.625 108.25,64 U3.16
MCU_PA7: J3.5 U3.17 | length 10
  L1 (Signal) w0.25: J3.5 108.25,56.275 108.25,62.75 108.75,63.25 U3.17
MCU_SWCLK: J2.4 U3.37 | length 10.4
  L1 (Signal) w0.25: U3.37 112.25,73.25 113.25,74.25 116.75,74.25 119.21,76.71 J2.4
MCU_SWDIO: J2.2 U3.34 | length 11.8
  L1 (Signal) w0.25: U3.34 115.396,71 115.5,71 119.49,74.99 ccw(c118.575,76.21) 119.681,75.16 120.48,75.999 J2.2
MCU_SWO: J2.6 U3.39 | length 10.2
  L1 (Signal) w0.25: U3.39 111.25,73.864 113.136,75.75 116.5,75.75 117.94,77.19 J2.6
MCU_VCAP1: C16.2 U3.22 | length 1.9
  L1 (Signal) w0.25: 111.25,65.25 U3.22
  L1 (Signal) w0.3: C16.2 111.25,65.25
USB_D_N: J1.2 U3.32 | length 11.1
  L1 (Signal) w0.281: U3.32 112.908,70.008 118.05,70.008 118.225,69.833 123.757,69.833 J1.2
USB_D_P: J1.3 U3.33 | length 11.1
  L1 (Signal) w0.281: U3.33 112.908,70.492 118.251,70.492 118.426,70.317 123.757,70.317 J1.3
VBUS: C1.2 FB1.1 J1.1
XTAL_IN: C9.2 R6.1 X1.3 | length 2.9
  L1 (Signal) w0.25: R6.1@101.75,69 101.75,67.75 101.75,66.35 X1.3
pads on no net: J1.4 J1.6 J1.7 J1.8 J1.9 J1.10 J1.11 J2.MH J3. U2.2 U2.3 U2.4 U2.5 U2.6 U2.7 U2.14 U2.15 U2.16 U2.17 U2.19 U2.21 U2.22 U3.2 U3.3 U3.4 U3.10 U3.11 U3.12 U3.13 U3.18 U3.19 U3.20 U3.21 U3.25 U3.27 U3.28 U3.29 U3.30 U3.31 U3.38 U3.40 U3.41 U3.46

## Polygon pours and split planes (outlines as drawn)
+5V on L1 (Signal) "+5V_L01_P001" (solid, pour order 1): 118.8,66.1 116.9,64.2 116.9,62.2 116.7,62 115.7,62 115.4,61.7 115.4,60.5 115.1,60.2 113.8,60.2 113.6,60.4 113.6,62.7 115.8,64.9 116.6,65.7 116.6,66.7 118.6,68.7 118.8,68.7 119,68.9 120,68.9 120.1,68.8 120.1,66.2 120,66.1
GND on L1 (Signal) "GND_L01_P009" (solid, pour order 9): 117.2,64.1 117.2,62.3 117.4,62.1 117.9,62.1 118.3,61.7 118.3,60.4 120.7,58 122.75,58 123,58.25 123,60.75 122.75,61 121.5,61 121,61.5 121,63.25 121.75,64 121.75,65.65 121.5,65.9 119,65.9
+3V3 on L1 (Signal) "+3V3_L01_P002" (solid, pour order 2): 116,61.8 117.5,61.8 117.7,61.6 117.7,60.5 120.4,57.8 122.4,57.8 122.9,57.3 122.9,55.6 122.8,55.5 120,55.5 118.9,54.4 118.9,53.7 118.6,53.4 115,53.4 114.5,53.9 114.5,59 115.8,60.3 115.8,61.6
VBUS on L1 (Signal) "VBUS_L01_P000" (solid, pour order 0): 124.6,69.4 120.7,69.4 120.3,69 120.3,66.2 120.5,66 121.8,66 122,66.2 122,68.5 122.3,68.8 124.6,68.8
GND on L2 (GND) "GND_L02_P004" (solid, pour order 4): 94.5,83.5 cw(c95.5,83.5) 95.5,84.5 126.5,84.5 cw(c126.5,83.5) 127.5,83.5 127.5,53 cw(c126,53) 126,51.5 96,51.5 cw(c96,53) 94.5,53
GND on L2 (GND) (Mid2) "GND_L03_P005" (solid, pour order 5): 94.5,83.5 cw(c95.5,83.5) 95.5,84.5 126.5,84.5 cw(c126.5,83.5) 127.5,83.5 127.5,53 cw(c126,53) 126,51.5 96,51.5 cw(c96,53) 94.5,53

## Silkscreen, mask and mechanical layers (free items; w line width, h text height)
Top Overlay:
  drawing of 2 lines, arcs and shapes, not listed
  text "SWD" at 115.754,74.254 h1.52
  text "USB" at 123.504,63.504 h1.52
  text "GPIO" at 103.004,58.004 h1.52
Mechanical 1:
  lines w0.254: 94,52.27 ccw(c95.27,52.27) 95.27,51 126,51 126.73,51 ccw(c126.73,52.27) 128,52.27 128,83.73 ccw(c126.73,83.73) 126.73,85 95.27,85 ccw(c95.27,83.73) 94,83.73 94,82 94,52.27

## Text inside footprints (layer, text, board x,y; h text height)
D1: Mechanical 13 "+" at 123.492,54.867 h0.5 r90
D2: Mechanical 13 "+" at 113.117,67.508 h0.5